# EAGLE board rj45-breakout-1.0 (EAGLE 9.6.1)
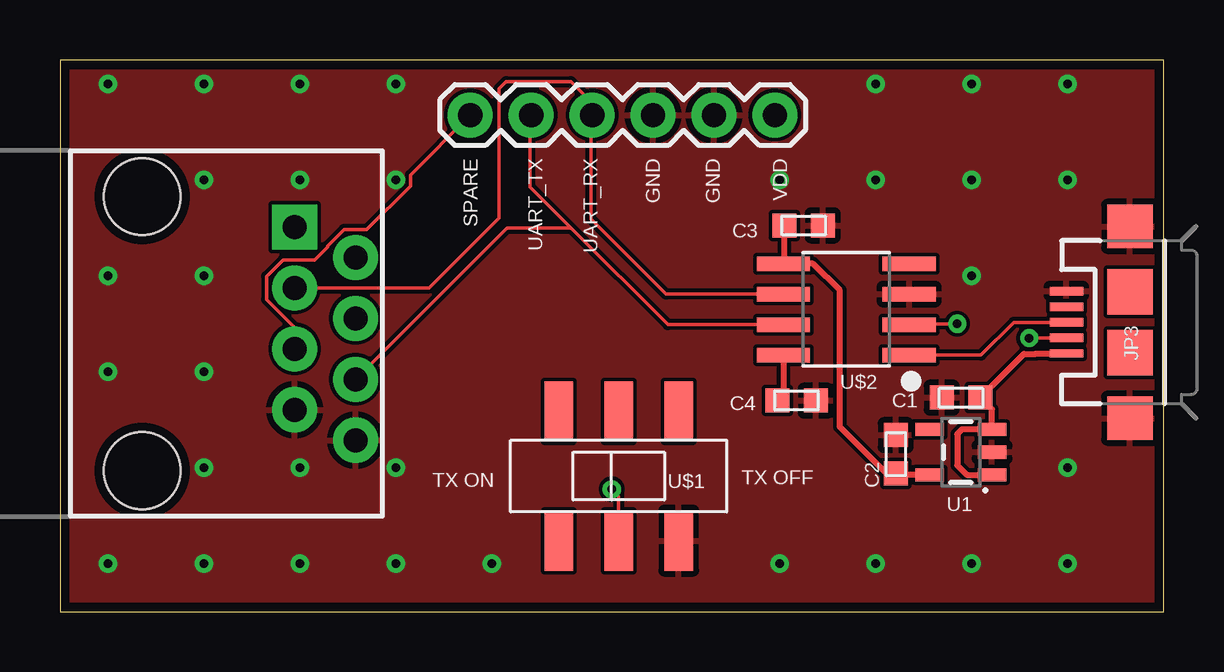
[diagram p0: board, top side]
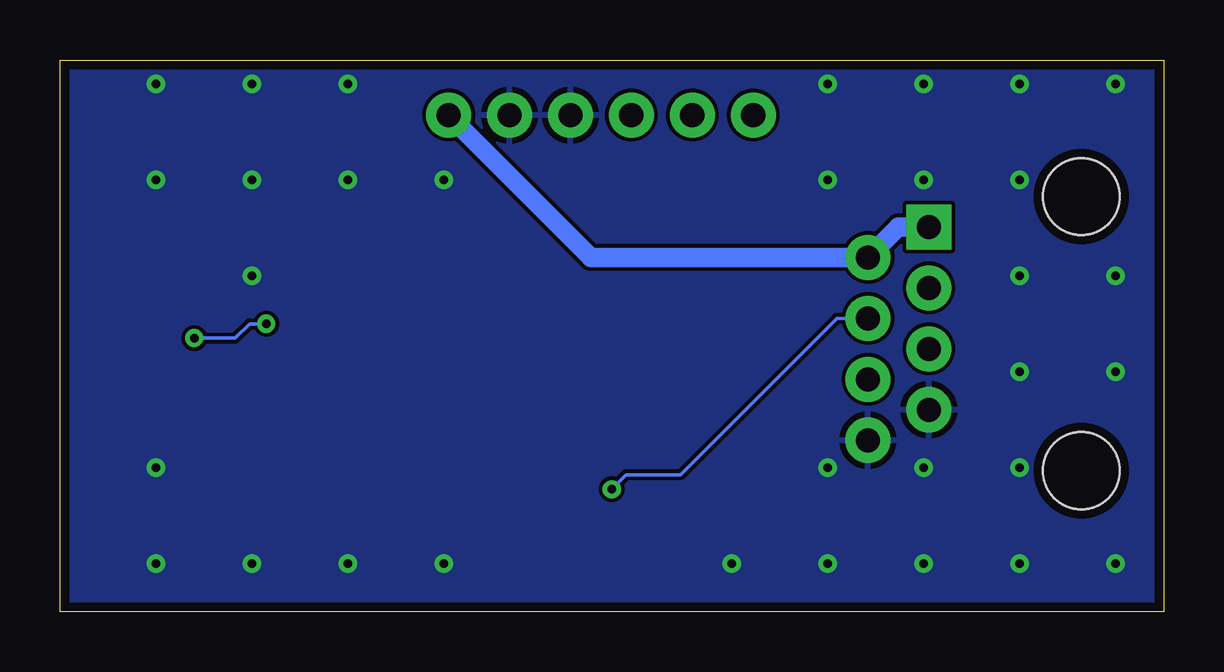
[diagram p1: board, bottom side, seen from below]

Size 46 x 23 mm. Coordinates in mm from the lower left corner, seen from the top.
Outline: 0,0 46,0 46,23 0,23 0,0
Copper layers (1*16): Top 0.035mm / dielectric 1.5mm / Bottom 0.035mm
Design rules "default *": minimum track width 6mil, minimum drill 0.3mm, track to track 6mil, track to pad 6mil, pad to pad 6mil, via to via 6mil, smd to smd 0mil, copper to edge 15mil, drill to drill 6mil, minimum pad ring 10mil, minimum via ring 8mil, stop-mask expansion 0mil, vias tented up to drill 20mil, thermal gap 10mil

## Footprints (pad centres in the part's own frame; a part is rotated, then mirrored left to right if it is on the bottom)
0603 = smd 1 x 1: P$1 -0.8,0; P$2 0.8,0
RJ45-8 = drill 1 pad 1.88 square: 1 -4.445,6.35 | drill 1 pad 1.88: 2 -3.175,8.89; 3 -1.905,6.35; 4 -0.635,8.89; 5 0.635,6.35; 6 1.905,8.89; 7 3.175,6.35; 8 4.445,8.89 | hole 3.2: -5.715,0; 5.715,0
1X06 = drill 1.016 pad 1.88: 1 0,0; 2 2.54,0; 3 5.08,0; 4 7.62,0; 5 10.16,0; 6 12.7,0
USB-MICROB = smd 0.35 x 1.4: D+ 0,2.65; D- -0.65,2.65; GND 1.3,2.65; ID 0.65,2.65; VBUS -1.3,2.65 | smd 1.8 x 1.9: MT1 -4,0; MT2 4,0 | smd 1.9 x 1.9: P$1 -1.27,0; P$2 1.27,0
SOT23-5 = smd 0.55 x 1.2: 1 -0.95,-1.3; 2 0,-1.3; 3 0.95,-1.3; 4 0.95,1.3; 5 -0.95,1.3
DPDT-SMD = smd 1.2 x 2.5: P$1 -2.5,-2.7; P$2 0,-2.7; P$3 2.5,-2.7; P$4 2.5,2.7; P$5 0,2.7; P$6 -2.5,2.7
SOIC-8 = smd 2.21 x 0.61: 1 -2.616,1.905; 2 -2.616,0.635; 3 -2.616,-0.635; 4 -2.616,-1.905; 5 2.616,-1.905; 6 2.616,-0.635; 7 2.616,0.635; 8 2.616,1.905

## Placement (x,y rotation side)
C1  1uF  [0603]  37.56,8.92 180 top
C2  1uF  [0603]  34.84,6.56 90 top
C3  0.1uF  [0603]  31,16.1 0 top
C4  0.1uF  [0603]  30.7,8.8 0 top
JP1  RJ45  [RJ45-8]  3.43,11.59 270 top
JP2  [1X06]  17.1,20.7 0 top
JP3  USB-MICROB  [USB-MICROB]  44.6,12.06 90 top
U1  MCP1802T-3302I/OT  [SOT23-5]  37.55,6.65 90 top
U$1  JS202011SCQN  [DPDT-SMD]  23.29,5.65 180 top
U$2  CH330N  [SOIC-8]  32.78,12.6 180 top

## Library data of the parts
C1-C4 = MyPassives
JP1 = SparkFun-Connectors; PROD_ID: CONN-08506
JP2 = SparkFun-Connectors; PROD_ID: CONN-08437
JP3 = SparkFun-Connectors; PROD_ID: CONN-09505
U1 = SparkFun-PowerIC
U$1 = slide-switches
U$2 = JiangsuQinHeng

## Nets
3.3V: C2.P$1 C3.P$1 U1.5 U$2.5
GND: C1.P$2 C2.P$2 C3.P$2 C4.P$2 JP1.7 JP1.8 JP2.4 JP2.5 JP3.GND JP3.MT1 JP3.MT2 U1.2 U$1.P$6 U$2.3
N$1: C4.P$1 U$2.8
SPARE: JP1.5 JP2.1
TRANSPONDER_RX: JP1.3 JP2.3 U$2.6
TRANSPONDER_TX: JP1.6 JP2.2 U$2.7
TX_OFF: JP1.4 U$1.P$5
USB_DM: JP3.D- U$2.2
USB_DP: JP3.D+ U$2.1
V_BUS: C1.P$1 JP3.VBUS U1.1 U1.3
VDD: JP1.1 JP1.2 JP2.6

## Tracks (layer width: path | path; a pad name or v marks a point on that pad's centre or on a via)
3.3V
  Top 0.254: U1.5 34.9,5.7 C2.P$1 34.44,5.76 32.5,7.7 32.5,13.4 31.39,14.51 U$2.5 30.2,14.54 C3.P$1
GND  (via drill 0.35)
  other vias: 2,2 6,2 10,2 14,2 18,2 14,6 10,6 6,6 30,2 34,2 38,2 42,2 42,6 42,22 42,18 38,18 38,22 34,22 34,18 30,18 38,14 2,22 6,22 10,22 14,22 14,18 10,18 6,18 6,14 6,10 2,14 2,10
  pour Top: -1,25 48,25 48,-1 -1,-1
  pour Bottom: -3,26 50,26 50,-2 -3,-2
N$1
  Top 0.254: U$2.8 30.16,9.06 C4.P$1
SPARE
  Top 0.152: JP2.1 14.61,18.21 14.61,17.75 12.79,15.93 11.84,15.93 11.15,15.25 11.15,15.2 10.61,14.66 9.3,14.66 8.61,13.98 8.61,13.01 9.78,11.84 JP1.5
TRANSPONDER_RX
  Top 0.152: U$2.6 25.27,13.23 22.14,16.36 22.14,20.66 JP2.3 22.14,20.74 22.14,21.26 21.3,22.1 18.6,22.1 18.3,21.8 18.3,16.4 15.39,13.49 JP1.3
TRANSPONDER_TX
  Top 0.152: U$2.7 25.34,11.96 21.3,16 | 21.3,16 19.6,17.7 19.6,20.66 JP2.2 | JP1.6 18.64,16 21.3,16
TX_OFF  (via drill 0.35)
  Top 0.152: v23,5.1 23.29,4.81 U$1.P$5
  Bottom 0.152: JP1.4 13.62,12.22 20.14,5.7 22.4,5.7 v23,5.1
USB_DM  (via drill 0.35)
  Top 0.152: JP3.D- v40.41,11.41 v40.4,11.4 | v37.4,12 35.43,12 U$2.2
  Bottom 0.152: v40.4,11.4 38.7,11.4 38.1,12 v37.4,12
USB_DP
  Top 0.152: JP3.D+ 39.76,12.06 38.4,10.7 U$2.1
V_BUS
  Top 0.254: U1.1 37.8,5.7 37.4,6.1 37.4,7.4 37.6,7.6 U1.3 38.85,8.43 C1.P$1 40.18,10.74 40.67,10.74 40.69,10.76 JP3.VBUS
VDD
  Bottom 0.813: JP1.1 11.05,16.04 JP1.2 23.86,14.77 JP2.6

## Text on the board
tNames: SPARE | UART_TX | UART_RX | GND | GND | VDD | TX ON | TX OFF